# Allegro board SATROT-2-IMU.brd
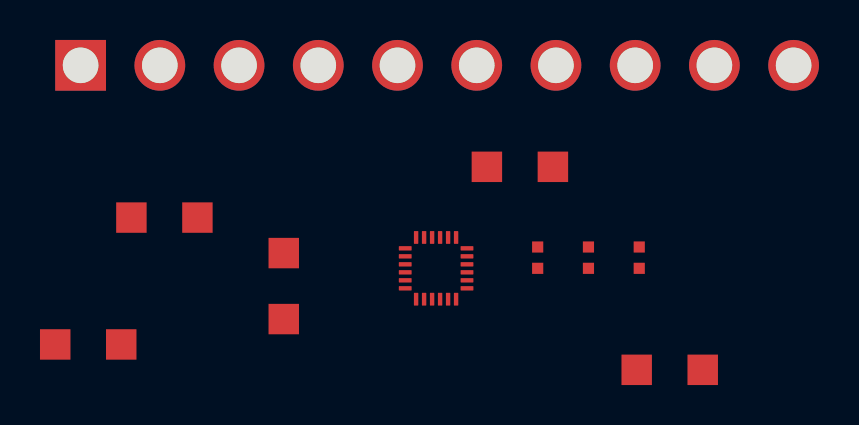
[diagram p0: board, top side]
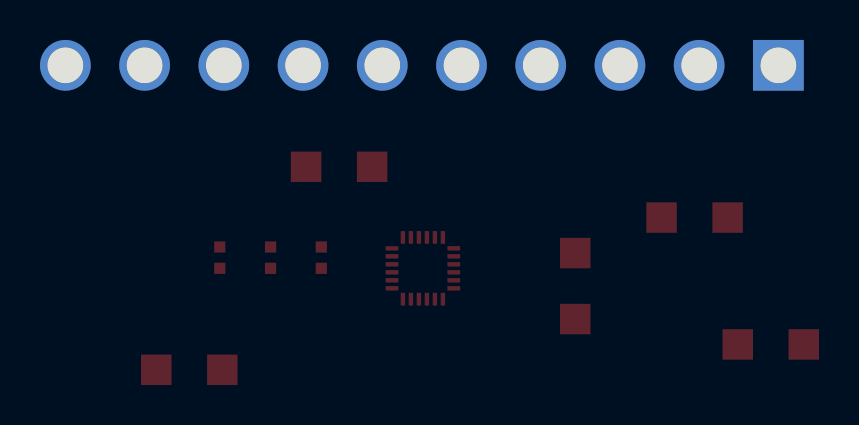
[diagram p1: board, bottom side, seen from below]

No outline. copper layers: TOP, BOTTOM. Coordinates in mm from the lowest, leftmost part position.

## Design rules (mm)
constraint set DEFAULT: min track width 0.305

## Placement (name value [footprint] x y rotation side)
C11  0.1uF  [SMC0402]  29.21 5.08 90 top
C12  0.01uF/10000pF  [SMC0402]  24.13 5.08 90 top
C13  0.1uF  [SMC0402]  26.67 5.08 90 top
J9  IMU pins  [BLKCON156VHTM1SQSW15610]  1.27 15.24 0 top
R21  10K  [SMR1206]  3.81 7.62 0 top
R22  10K  [SMR1206]  11.43 2.54 90 top
R23  10K  [SMR1206]  21.59 10.16 0 top
R24  10K  [SMR1206]  0 1.27 0 top
R25  10K  [SMR1206]  32.38 0 180 top
U3  MPU-9250  [QFN40P300X300X105-24N]  19.05 5.08 0 top

## Library data of the parts
C11-C13 = CAP NP
J9 = CON10
R21-R25 = R
U3 = MPU-9250

## Footprints (pads in the part's own frame, mm; a bottom-side part is the same pattern mirrored in y, then rotated)
BLKCON156VHTM1SQSW15610
  rect 2.54x2.54 hole 1.778: 1(0,0)
  round 2.54 hole 1.778: 2(3.962,0) 3(7.925,0) 4(11.887,0) 5(15.85,0) 6(19.812,0) 7(23.774,0) 8(27.737,0) 9(31.699,0) 10(35.662,0)
QFN40P300X300X105-24N
  custom 0.64x0.22 smd: 1(-1.545,1) 2(-1.545,0.6) 3(-1.545,0.2) 4(-1.545,-0.2) 5(-1.545,-0.6) 6(-1.545,-1) 13(1.545,-1) 14(1.545,-0.6) 15(1.545,-0.2) 16(1.545,0.2) 17(1.545,0.6) 18(1.545,1)
  custom 0.22x0.64 smd: 7(-1,-1.545) 8(-0.6,-1.545) 9(-0.2,-1.545) 10(0.2,-1.545) 11(0.6,-1.545) 12(1,-1.545) 19(1,1.545) 20(0.6,1.545) 21(0.2,1.545) 22(-0.2,1.545) 23(-0.6,1.545) 24(-1,1.545)
SMC0402
  rect 0.559x0.559 smd: 1(0,0) 2(1.067,0)
SMR1206
  rect 1.524x1.524 smd: 1(0,0) 2(3.302,0)

## Nets
3V3: C12.1 C13.1 J9.1 R21.1 R22.1 R23.1 U3.1 U3.8(VDDIO) U3.13
GND: C11.2 C12.2 C13.2 J9.2 R24.2 R25.2 U3.18 U3.20
N11056: J9.3 R21.2 U3.23
N11068: J9.4 R22.2 U3.24
N11080: J9.5 U3.7
N11122: J9.6 U3.21
N11138: J9.7 R24.1 U3.9
N11163: J9.8 U3.12
N11188: J9.9 R23.2 U3.22
N11206: J9.10 R25.1 U3.11
N11441: C11.1 U3.10

Pads without a net: U3 2 3 4 5 6 14 15 16 17 19
